# EAGLE board PIR Relay (EAGLE 9.6.2)

Size 33.02 x 95.25 mm. Coordinates in mm from the lower left corner, seen from the top.
Outline: 0,0 33.02,0 33.02,95.25 0,95.25 0,0
Copper layers (1*16): Top 0.035mm / dielectric 0.15mm / Bottom 0.035mm
Design rules "default": minimum track width 6mil, minimum drill 0.35mm, track to track 6mil, track to pad 6mil, pad to pad 6mil, via to via 6mil, smd to smd 6mil, copper to edge 40mil, drill to drill 6mil, minimum pad ring 10mil, minimum via ring 8mil, stop-mask expansion 4mil, vias tented up to drill 0mil, thermal gap 10mil

## Footprints (pad centres in the part's own frame; a part is rotated, then mirrored left to right if it is on the bottom)
0603 = smd 1.1 x 1: 1 -0.85,0; 2 0.85,0
PANASONIC_D = smd 3 x 1.4: + 2.4,0; - -2.4,0
EIA3216 = smd 1.4 x 1.6: + 1.4,0; - -1.4,0
SOD-323 = smd 0.63 x 0.83: A 1.15,0; C -1.15,0
LED-0603 = smd 1 x 1: A -0.877,0; C 0.877,0
SMA-DIODE = smd 1.27 x 1.47: A -2.15,0; C 2.15,0
STAND-OFF = hole 3.302: 0,0
POWER_JACK_PTH = drill 2.997 pad 4.318: GND 0,7.7; GNDBREAK 4.7,10.7; PWR 0,13.7
JST-3-SMD = smd 1 x 4.6: 1 2.01,-4.77; 2 0.01,-4.77; 3 -1.99,-4.77 | smd 1.6 x 3.4: NC1 -4.39,0.43; NC2 4.41,0.43
SCREWTERMINAL-3.5MM-3_LOCK.007S = drill 1.2 pad 2.032 square: 1 -0.178,0 | drill 1.2 pad 2.032: 2 3.5,0; 3 7.178,0
2X3_LOCK = drill 1.016 pad 1.88: 1 0,0.127; 2 0,2.667; 3 2.54,-0.127; 4 2.54,2.413; 5 5.08,0.127; 6 5.08,2.667
1X06-SMD_RA_MALE = smd 1 x 3: 1 -6.35,5; 2 -3.81,5; 3 -1.27,5; 4 1.27,5; 5 3.81,5; 6 6.35,5 | hole 1.4: -5.08,0; 5.08,0
RELAY-T90 = drill 1.1 pad 1.956: COIL1 0,-13.9; COIL2 0,-3.81 | drill 2.1: MAIN -12.7,-17.78; NC -22.86,0; NO -15.24,0
0805 = smd 0.8 x 1.2: 1 -0.9,0; 2 0.9,0
SOT23-3 = smd 0.8 x 0.9: 1 -0.95,-1; 2 0.95,-1; 3 0,1.1
TACTILE_SWITCH_SMD_5.2MM = smd 1.524 x 0.762: 1 -2.794,1.905; 2 2.794,1.905; 3 -2.794,-1.905; 4 2.794,-1.905
SOT23-5 = smd 0.55 x 1.2: 1 -0.95,-1.3; 2 0,-1.3; 3 0.95,-1.3; 4 0.95,1.3; 5 -0.95,1.3
TQFP32-08 = smd 1.27 x 0.559: 1 -4.293,2.8; 2 -4.293,2; 3 -4.293,1.2; 4 -4.293,0.4; 5 -4.293,-0.4; 6 -4.293,-1.2; 7 -4.293,-2; 8 -4.293,-2.8; 17 4.293,-2.8; 18 4.293,-2; 19 4.293,-1.2; 20 4.293,-0.4; 21 4.293,0.4; 22 4.293,1.2; 23 4.293,2; 24 4.293,2.8 | smd 0.559 x 1.27: 9 -2.8,-4.293; 10 -2,-4.293; 11 -1.2,-4.293; 12 -0.4,-4.293; 13 0.4,-4.293; 14 1.2,-4.293; 15 2,-4.293; 16 2.8,-4.293; 25 2.8,4.293; 26 2,4.293; 27 1.2,4.293; 28 0.4,4.293; 29 -0.4,4.293; 30 -1.2,4.293; 31 -2,4.293; 32 -2.8,4.293
SOT223 = smd 1.219 x 2.235: 1 -2.311,-3.099; 2 0,-3.099; 3 2.311,-3.099 | smd 3.6 x 2.2: 4 0,3.099
RESONATOR-SMD-3.2X1.3 = smd 0.45 x 1.905: 1 -1.2,0; 2 0,0; 3 1.2,0

## Placement (x,y rotation side)
C1  0.1uF  [0603]  -69.85,63.5 0 top  (outside the outline)
C2  1.0uF  [0603]  -15.24,69.85 0 top  (outside the outline)
C3  1.0uF  [0603]  -19.05,69.85 0 top  (outside the outline)
C4  0.1uF  [0603]  -22.86,69.85 0 top  (outside the outline)
C5  0.1uF  [0603]  -26.67,69.85 0 top  (outside the outline)
C6  47uF  [PANASONIC_D]  -17.78,57.15 0 top  (outside the outline)
C7  10uF  [EIA3216]  -41.91,63.5 0 top  (outside the outline)
C8  0.1uF  [0603]  -30.48,69.85 0 top  (outside the outline)
D1  1A/23V/620mV  [SOD-323]  -57.15,63.5 0 top  (outside the outline)
D2  1A/23V/620mV  [SOD-323]  -64.77,63.5 0 top  (outside the outline)
D3  BLUE  [LED-0603]  -15.24,73.66 0 top  (outside the outline)
D4  1A/40V/500mV  [SMA-DIODE]  3.81,49.53 0 top
D5  BLUE  [LED-0603]  -19.05,73.66 0 top  (outside the outline)
D6  GREEN  [LED-0603]  -22.86,73.66 0 top  (outside the outline)
FRAME1  FRAME-LEDGER  [CREATIVE_COMMONS]  -80.01,44.45 0 top  (outside the outline)
H1  STAND-OFF  [STAND-OFF]  29.21,3.81 0 top
H2  STAND-OFF  [STAND-OFF]  3.81,3.81 0 top
H3  STAND-OFF  [STAND-OFF]  27.94,91.44 0 top
H4  STAND-OFF  [STAND-OFF]  3.81,91.44 0 top
J1  POWER_JACK  [POWER_JACK_PTH]  -3.81,16.51 270 top
J2  3-PIN SMD  [JST-3-SMD]  29.21,21.59 270 top
J3  [SCREWTERMINAL-3.5MM-3_LOCK.007S]  12.7,90.17 0 top
J4  AVR_SPI_PROG_3X22X3_LOCK  [2X3_LOCK]  29.21,59.69 90 top
J6  RA 6Pin SMD  [1X06-SMD_RA_MALE]  16.51,2.54 0 bottom
K1  RELAY-SPDT-JQX-15F  [RELAY-T90]  22.86,58.42 270 top
L1  10μH  [0805]  -46.99,63.5 0 top  (outside the outline)
Q1  600mA/40V  [SOT23-3]  -29.21,64.77 0 top  (outside the outline)
R1  10k  [0603]  -34.29,69.85 0 top  (outside the outline)
R2  43k  [0603]  -38.1,69.85 0 top  (outside the outline)
R3  100k  [0603]  -41.91,69.85 0 top  (outside the outline)
R4  5.1k  [0603]  -45.72,69.85 0 top  (outside the outline)
R6  240  [0603]  -49.53,69.85 0 top  (outside the outline)
R7  330  [0603]  -53.34,69.85 0 top  (outside the outline)
R8  330  [0603]  -57.15,69.85 0 top  (outside the outline)
R9  715  [0603]  -60.96,69.85 0 top  (outside the outline)
R10  1k  [0603]  -64.77,69.85 0 top  (outside the outline)
R11  1k  [0603]  -68.58,69.85 0 top  (outside the outline)
R12  0  [0603]  -72.39,69.85 0 top  (outside the outline)
S1  [TACTILE_SWITCH_SMD_5.2MM]  27.94,11.43 0 top
U1  AP3012  [SOT23-5]  -49.53,55.88 0 top  (outside the outline)
U2  ATMEGA328P_TQFP  [TQFP32-08]  16.51,34.29 180 top
U3  [SOT223]  -44.45,33.02 0 top  (outside the outline)
Y1  [RESONATOR-SMD-3.2X1.3]  -50.8,63.5 0 top  (outside the outline)

## Library data of the parts
C1 = SparkFun-Capacitors; PROD_ID: CAP-08604
C2 C3 = SparkFun-Capacitors; PROD_ID: CAP-00868
C4 C5 C8 = SparkFun-Capacitors; PROD_ID: CAP-00810
C6 = SparkFun-Capacitors; PROD_ID: CAP-08478
C7 = SparkFun-Capacitors; PROD_ID: CAP-00811
D1 D2 = SparkFun-DiscreteSemi; PROD_ID: DIO-11623
D3 D5 = SparkFun-LED; PROD_ID: DIO-08575
D4 = SparkFun-DiscreteSemi; PROD_ID: DIO-08053
D6 = SparkFun-LED; PROD_ID: DIO-00821
FRAME1 = SparkFun-Aesthetics
H1-H4 = SparkFun-Hardware
J1 = SparkFun-Connectors; PROD_ID: CONN-08197
J2 = SparkFun-Connectors; PROD_ID: CONN-12591
J3 = SparkFun-Connectors; PROD_ID: CONN-08288; SF_ID: PRT-08235
J4 = SparkFun-Connectors
J6 = SparkFun-Connectors; PROD_ID: CONN-08971
K1 = SparkFun-Electromechanical; PROD_ID: COMP-10736; SF_SKU: COM-10924
L1 = SparkFun-Coils; PROD_ID: NDUC-13231
Q1 = SparkFun-DiscreteSemi; PROD_ID: TRANS-08049
R1 = SparkFun-Resistors; PROD_ID: RES-00824
R2 = SparkFun-Resistors; PROD_ID: RES-07858
R3 = SparkFun-Resistors; PROD_ID: RES-07828
R4 = SparkFun-Resistors; PROD_ID: RES-12083
R6 = SparkFun-Resistors; PROD_ID: RES-07849
R7 R8 = SparkFun-Resistors; PROD_ID: RES-00818
R9 = SparkFun-Resistors; PROD_ID: RES-07850
R10 R11 = SparkFun-Resistors; PROD_ID: RES-07856
R12 = SparkFun-Resistors; PROD_ID: RES-08609
S1 = SparkFun-Switches; PROD_ID: SWCH-14139
U1 = SparkFun-IC-Power; PROD_ID: VREG-13911
U2 = SparkFun-IC-Microcontroller; PROD_ID: IC-09069
U3 = SparkFun-IC-Power; PROD_ID: VREG-08170
Y1 = SparkFun-Clocks

## Nets
5V: C2.1 C7.+ C8.1 D3.A J4.2 J6.4 L1.1 R1.2 R3.2 R6.2 R12.1 U1.4 U1.5 U2.4 U2.6 U2.18 U3.2 U3.4
AREF: C4.1 U2.20
COM: J3.2 K1.MAIN
CTS: J6.5
DTR: C5.1 J6.1
FTDI-RX: D5.A J6.2 U2.31
FTDI-TX: D6.A J6.3 U2.30
GND: C1.2 C2.2 C3.2 C4.2 C6.- C7.- C8.2 J1.GND J1.GNDBREAK J2.2 J4.6 J6.6 Q1.2 R4.1 R9.1 R10.1 R11.1 S1.1 S1.2 U1.2 U2.3 U2.5 U2.21 Y1.2
MISO: J4.1 U2.16
MOSI: J4.4 U2.15
N$1: D2.A L1.2 U1.1
N$2: D5.C R10.2
N$6: Q1.1 R8.2
N$7: D1.A K1.COIL2 Q1.3 R7.2
N$8: D1.C K1.COIL1 R12.2
N$9: D3.C R7.1
N$10: U2.7 Y1.1
N$11: U2.8 Y1.3
N$12: D4.A J1.PWR
N$13: R6.1 R9.2 U3.1
N$14: D6.C R11.2
N$15: R2.1 R4.2 U1.3
NC: J3.1 K1.NC
NO: J3.3 K1.NO
PIR_#_12V: C3.1 D2.C J2.1 R2.2
PIR_#_ALARM: J2.3 R3.1 U2.25
RELAY_#_CONTROL: R8.1 U2.23
RESET: C5.2 J4.5 R1.1 S1.3 S1.4 U2.29
SCK: J4.3 U2.17
SCL: U2.28
SDA: U2.27
VIN: C1.1 C6.+ D4.C U3.3

## Tracks (layer width: path | path; a pad name or v marks a point on that pad's centre or on a via)
5V  (17 unrouted)
AREF  (1 unrouted)
COM  (1 unrouted)
DTR  (1 unrouted)
FTDI-RX  (2 unrouted)
FTDI-TX  (2 unrouted)
GND  (23 unrouted)
MISO  (1 unrouted)
MOSI  (1 unrouted)
N$1  (2 unrouted)
N$2  (1 unrouted)
N$6  (1 unrouted)
N$7  (3 unrouted)
N$8  (2 unrouted)
N$9  (1 unrouted)
N$10  (1 unrouted)
N$11  (1 unrouted)
N$12  (1 unrouted)
N$13  (2 unrouted)
N$14  (1 unrouted)
N$15  (2 unrouted)
NC  (1 unrouted)
NO  (1 unrouted)
PIR_#_12V  (3 unrouted)
PIR_#_ALARM  (2 unrouted)
RELAY_#_CONTROL  (1 unrouted)
RESET  (5 unrouted)
SCK  (1 unrouted)
VIN  (3 unrouted)